# Altium PCB GRIPPER2009.PcbDoc (part 2 of 4)
Units mm, origin at the board's own origin, x right, y up, seen from the top; angles counter-clockwise.
Board outline 100.25 x 80.25 mm, 4 copper layers (Top Layer, Mid-Layer 1, Mid-Layer 2, Bottom Layer); 370 components, 241 nets, 1110 pads, 418 vias.
Unrouted connection lines stored in the file: 10.
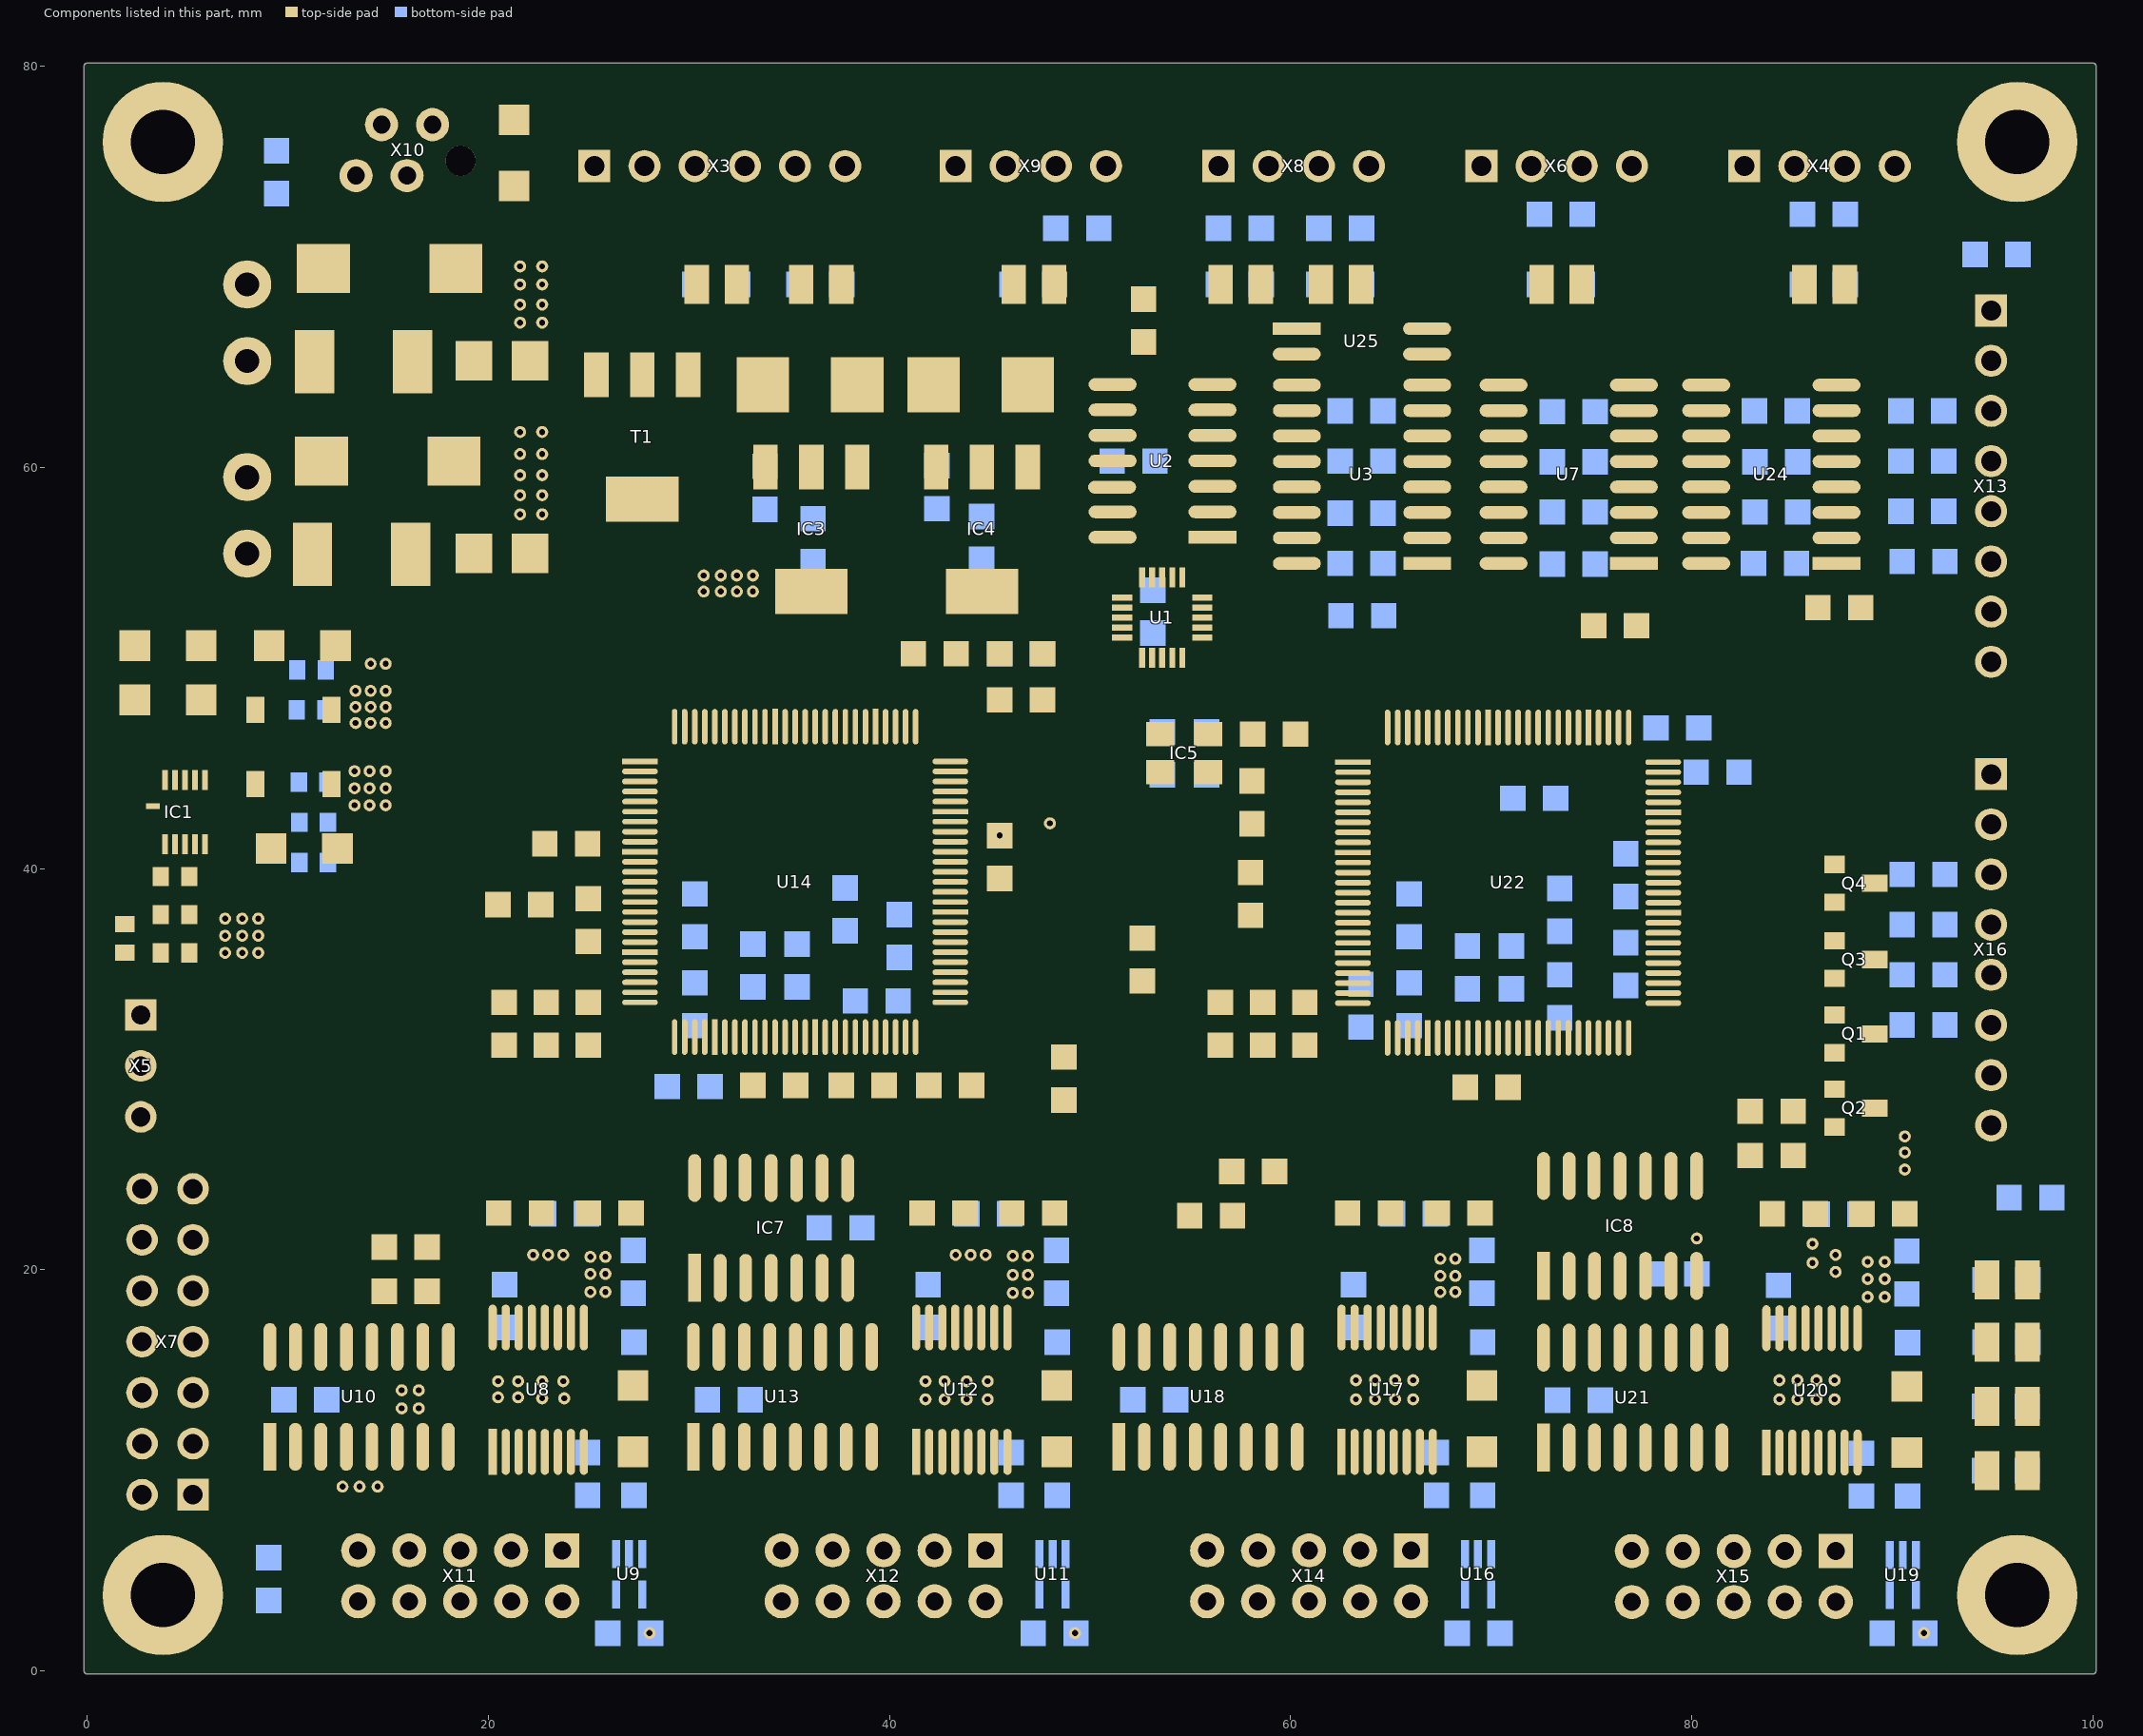
[diagram p4: the components of this part, seen from the top]

## Design rules (kind name [scope] priority, off if disabled: settings) (continued)
ViasUnderSMD VIA_UnderSMD_295 [(Name = 'R24-2')] p679: allowed=FALSE
ViasUnderSMD VIA_UnderSMD_294 [(Name = 'R24-1')] p680: allowed=FALSE
ViasUnderSMD VIA_UnderSMD_293 [(Name = 'R23-2')] p681: allowed=FALSE
ViasUnderSMD VIA_UnderSMD_292 [(Name = 'R23-1')] p682: allowed=FALSE
ViasUnderSMD VIA_UnderSMD_291 [(Name = 'R22-2')] p683: allowed=FALSE
ViasUnderSMD VIA_UnderSMD_290 [(Name = 'R22-1')] p684: allowed=FALSE
ViasUnderSMD VIA_UnderSMD_289 [(Name = 'R21-2')] p685: allowed=FALSE
ViasUnderSMD VIA_UnderSMD_288 [(Name = 'R21-1')] p686: allowed=FALSE
ViasUnderSMD VIA_UnderSMD_287 [(Name = 'R20-2')] p687: allowed=FALSE
ViasUnderSMD VIA_UnderSMD_286 [(Name = 'R20-1')] p688: allowed=FALSE
ViasUnderSMD VIA_UnderSMD_285 [(Name = 'R19-2')] p689: allowed=FALSE
ViasUnderSMD VIA_UnderSMD_284 [(Name = 'R19-1')] p690: allowed=FALSE
ViasUnderSMD VIA_UnderSMD_283 [(Name = 'R18-2')] p691: allowed=FALSE
ViasUnderSMD VIA_UnderSMD_282 [(Name = 'R18-1')] p692: allowed=FALSE
ViasUnderSMD VIA_UnderSMD_281 [(Name = 'R17-2')] p693: allowed=FALSE
ViasUnderSMD VIA_UnderSMD_280 [(Name = 'R17-1')] p694: allowed=FALSE
ViasUnderSMD VIA_UnderSMD_279 [(Name = 'R16-2')] p695: allowed=FALSE
ViasUnderSMD VIA_UnderSMD_278 [(Name = 'R16-1')] p696: allowed=FALSE
ViasUnderSMD VIA_UnderSMD_277 [(Name = 'R15-2')] p697: allowed=FALSE
ViasUnderSMD VIA_UnderSMD_276 [(Name = 'R15-1')] p698: allowed=FALSE
ViasUnderSMD VIA_UnderSMD_275 [(Name = 'R14-2')] p699: allowed=FALSE
ViasUnderSMD VIA_UnderSMD_274 [(Name = 'R14-1')] p700: allowed=FALSE
ViasUnderSMD VIA_UnderSMD_273 [(Name = 'R13-2')] p701: allowed=FALSE
ViasUnderSMD VIA_UnderSMD_272 [(Name = 'R13-1')] p702: allowed=FALSE
ViasUnderSMD VIA_UnderSMD_271 [(Name = 'R12-2')] p703: allowed=FALSE
ViasUnderSMD VIA_UnderSMD_270 [(Name = 'R12-1')] p704: allowed=FALSE
ViasUnderSMD VIA_UnderSMD_269 [(Name = 'R11-2')] p705: allowed=FALSE
ViasUnderSMD VIA_UnderSMD_268 [(Name = 'R11-1')] p706: allowed=FALSE
ViasUnderSMD VIA_UnderSMD_267 [(Name = 'R10-2')] p707: allowed=FALSE
ViasUnderSMD VIA_UnderSMD_266 [(Name = 'R10-1')] p708: allowed=FALSE
ViasUnderSMD VIA_UnderSMD_265 [(Name = 'R8-2')] p709: allowed=FALSE
ViasUnderSMD VIA_UnderSMD_264 [(Name = 'R8-1')] p710: allowed=FALSE
ViasUnderSMD VIA_UnderSMD_263 [(Name = 'R7-2')] p711: allowed=FALSE
ViasUnderSMD VIA_UnderSMD_262 [(Name = 'R7-1')] p712: allowed=FALSE
ViasUnderSMD VIA_UnderSMD_261 [(Name = 'R6-2')] p713: allowed=FALSE
ViasUnderSMD VIA_UnderSMD_260 [(Name = 'R6-1')] p714: allowed=FALSE
ViasUnderSMD VIA_UnderSMD_259 [(Name = 'R5-2')] p715: allowed=FALSE
ViasUnderSMD VIA_UnderSMD_258 [(Name = 'R5-1')] p716: allowed=FALSE
ViasUnderSMD VIA_UnderSMD_257 [(Name = 'R3-2')] p717: allowed=FALSE
ViasUnderSMD VIA_UnderSMD_256 [(Name = 'R3-1')] p718: allowed=FALSE
ViasUnderSMD VIA_UnderSMD_255 [(Name = 'R2-2')] p719: allowed=FALSE
ViasUnderSMD VIA_UnderSMD_254 [(Name = 'R2-1')] p720: allowed=FALSE
ViasUnderSMD VIA_UnderSMD_253 [(Name = 'R1-2')] p721: allowed=FALSE
ViasUnderSMD VIA_UnderSMD_252 [(Name = 'R1-1')] p722: allowed=FALSE
ViasUnderSMD VIA_UnderSMD_251 [(Name = 'Q4-3')] p723: allowed=FALSE
ViasUnderSMD VIA_UnderSMD_250 [(Name = 'Q4-2')] p724: allowed=FALSE
ViasUnderSMD VIA_UnderSMD_249 [(Name = 'Q4-1')] p725: allowed=FALSE
ViasUnderSMD VIA_UnderSMD_248 [(Name = 'Q3-3')] p726: allowed=FALSE
ViasUnderSMD VIA_UnderSMD_247 [(Name = 'Q3-2')] p727: allowed=FALSE
ViasUnderSMD VIA_UnderSMD_246 [(Name = 'Q3-1')] p728: allowed=FALSE
ViasUnderSMD VIA_UnderSMD_245 [(Name = 'Q2-3')] p729: allowed=FALSE
ViasUnderSMD VIA_UnderSMD_244 [(Name = 'Q2-2')] p730: allowed=FALSE
ViasUnderSMD VIA_UnderSMD_243 [(Name = 'Q2-1')] p731: allowed=FALSE
ViasUnderSMD VIA_UnderSMD_242 [(Name = 'Q1-3')] p732: allowed=FALSE
ViasUnderSMD VIA_UnderSMD_241 [(Name = 'Q1-2')] p733: allowed=FALSE
ViasUnderSMD VIA_UnderSMD_240 [(Name = 'Q1-1')] p734: allowed=FALSE
ViasUnderSMD VIA_UnderSMD_239 [(Name = 'L5-2')] p735: allowed=FALSE
ViasUnderSMD VIA_UnderSMD_238 [(Name = 'L5-1')] p736: allowed=FALSE
ViasUnderSMD VIA_UnderSMD_237 [(Name = 'L3-2')] p737: allowed=FALSE
ViasUnderSMD VIA_UnderSMD_236 [(Name = 'L3-1')] p738: allowed=FALSE
ViasUnderSMD VIA_UnderSMD_235 [(Name = 'L2-2')] p739: allowed=FALSE
ViasUnderSMD VIA_UnderSMD_234 [(Name = 'L2-1')] p740: allowed=FALSE
ViasUnderSMD VIA_UnderSMD_233 [(Name = 'L1-2')] p741: allowed=FALSE
ViasUnderSMD VIA_UnderSMD_232 [(Name = 'L1-1')] p742: allowed=FALSE
ViasUnderSMD VIA_UnderSMD_231 [(Name = 'IC8-14')] p743: allowed=FALSE
ViasUnderSMD VIA_UnderSMD_230 [(Name = 'IC8-13')] p744: allowed=FALSE
ViasUnderSMD VIA_UnderSMD_229 [(Name = 'IC8-12')] p745: allowed=FALSE
ViasUnderSMD VIA_UnderSMD_228 [(Name = 'IC8-11')] p746: allowed=FALSE
ViasUnderSMD VIA_UnderSMD_227 [(Name = 'IC8-10')] p747: allowed=FALSE
ViasUnderSMD VIA_UnderSMD_226 [(Name = 'IC8-9')] p748: allowed=FALSE
ViasUnderSMD VIA_UnderSMD_225 [(Name = 'IC8-8')] p749: allowed=FALSE
ViasUnderSMD VIA_UnderSMD_224 [(Name = 'IC8-7')] p750: allowed=FALSE
ViasUnderSMD VIA_UnderSMD_223 [(Name = 'IC8-6')] p751: allowed=FALSE
ViasUnderSMD VIA_UnderSMD_222 [(Name = 'IC8-5')] p752: allowed=FALSE
ViasUnderSMD VIA_UnderSMD_221 [(Name = 'IC8-4')] p753: allowed=FALSE
ViasUnderSMD VIA_UnderSMD_220 [(Name = 'IC8-3')] p754: allowed=FALSE
ViasUnderSMD VIA_UnderSMD_219 [(Name = 'IC8-2')] p755: allowed=FALSE
ViasUnderSMD VIA_UnderSMD_218 [(Name = 'IC8-1')] p756: allowed=FALSE
ViasUnderSMD VIA_UnderSMD_217 [(Name = 'IC7-14')] p757: allowed=FALSE
ViasUnderSMD VIA_UnderSMD_216 [(Name = 'IC7-13')] p758: allowed=FALSE
ViasUnderSMD VIA_UnderSMD_215 [(Name = 'IC7-12')] p759: allowed=FALSE
ViasUnderSMD VIA_UnderSMD_214 [(Name = 'IC7-11')] p760: allowed=FALSE
ViasUnderSMD VIA_UnderSMD_213 [(Name = 'IC7-10')] p761: allowed=FALSE
ViasUnderSMD VIA_UnderSMD_212 [(Name = 'IC7-9')] p762: allowed=FALSE
ViasUnderSMD VIA_UnderSMD_211 [(Name = 'IC7-8')] p763: allowed=FALSE
ViasUnderSMD VIA_UnderSMD_210 [(Name = 'IC7-7')] p764: allowed=FALSE
ViasUnderSMD VIA_UnderSMD_209 [(Name = 'IC7-6')] p765: allowed=FALSE
ViasUnderSMD VIA_UnderSMD_208 [(Name = 'IC7-5')] p766: allowed=FALSE
ViasUnderSMD VIA_UnderSMD_207 [(Name = 'IC7-4')] p767: allowed=FALSE
ViasUnderSMD VIA_UnderSMD_206 [(Name = 'IC7-3')] p768: allowed=FALSE
ViasUnderSMD VIA_UnderSMD_205 [(Name = 'IC7-2')] p769: allowed=FALSE
ViasUnderSMD VIA_UnderSMD_204 [(Name = 'IC7-1')] p770: allowed=FALSE
ViasUnderSMD VIA_UnderSMD_203 [(Name = 'IC5-4')] p771: allowed=FALSE
ViasUnderSMD VIA_UnderSMD_202 [(Name = 'IC5-3')] p772: allowed=FALSE
ViasUnderSMD VIA_UnderSMD_201 [(Name = 'IC5-2')] p773: allowed=FALSE
ViasUnderSMD VIA_UnderSMD_200 [(Name = 'IC5-1')] p774: allowed=FALSE
ViasUnderSMD VIA_UnderSMD_199 [(Name = 'IC4-4')] p775: allowed=FALSE
ViasUnderSMD VIA_UnderSMD_198 [(Name = 'IC4-3')] p776: allowed=FALSE
ViasUnderSMD VIA_UnderSMD_197 [(Name = 'IC4-2')] p777: allowed=FALSE
ViasUnderSMD VIA_UnderSMD_196 [(Name = 'IC4-1')] p778: allowed=FALSE
ViasUnderSMD VIA_UnderSMD_195 [(Name = 'IC3-4')] p779: allowed=FALSE
ViasUnderSMD VIA_UnderSMD_194 [(Name = 'IC3-3')] p780: allowed=FALSE
ViasUnderSMD VIA_UnderSMD_193 [(Name = 'IC3-2')] p781: allowed=FALSE
ViasUnderSMD VIA_UnderSMD_192 [(Name = 'IC3-1')] p782: allowed=FALSE
ViasUnderSMD VIA_UnderSMD_191 [(Name = 'IC1-S')] p783: allowed=FALSE
ViasUnderSMD VIA_UnderSMD_190 [(Name = 'IC1-10')] p784: allowed=FALSE
ViasUnderSMD VIA_UnderSMD_189 [(Name = 'IC1-9')] p785: allowed=FALSE
ViasUnderSMD VIA_UnderSMD_188 [(Name = 'IC1-8')] p786: allowed=FALSE
ViasUnderSMD VIA_UnderSMD_187 [(Name = 'IC1-7')] p787: allowed=FALSE
ViasUnderSMD VIA_UnderSMD_186 [(Name = 'IC1-6')] p788: allowed=FALSE
ViasUnderSMD VIA_UnderSMD_185 [(Name = 'IC1-5')] p789: allowed=FALSE
ViasUnderSMD VIA_UnderSMD_184 [(Name = 'IC1-4')] p790: allowed=FALSE
ViasUnderSMD VIA_UnderSMD_183 [(Name = 'IC1-3')] p791: allowed=FALSE
ViasUnderSMD VIA_UnderSMD_182 [(Name = 'IC1-2')] p792: allowed=FALSE
ViasUnderSMD VIA_UnderSMD_181 [(Name = 'IC1-1')] p793: allowed=FALSE
ViasUnderSMD VIA_UnderSMD_180 [(Name = 'H4-1')] p794: allowed=FALSE
ViasUnderSMD VIA_UnderSMD_179 [(Name = 'H3-1')] p795: allowed=FALSE
ViasUnderSMD VIA_UnderSMD_178 [(Name = 'H2-1')] p796: allowed=FALSE
ViasUnderSMD VIA_UnderSMD_177 [(Name = 'H1-1')] p797: allowed=FALSE
ViasUnderSMD VIA_UnderSMD_176 [(Name = 'F2-2')] p798: allowed=FALSE
ViasUnderSMD VIA_UnderSMD_175 [(Name = 'F2-1')] p799: allowed=FALSE
ViasUnderSMD VIA_UnderSMD_174 [(Name = 'F1-2')] p800: allowed=FALSE
ViasUnderSMD VIA_UnderSMD_173 [(Name = 'F1-1')] p801: allowed=FALSE
ViasUnderSMD VIA_UnderSMD_172 [(Name = 'D13-2')] p802: allowed=FALSE
ViasUnderSMD VIA_UnderSMD_171 [(Name = 'D13-1')] p803: allowed=FALSE
ViasUnderSMD VIA_UnderSMD_170 [(Name = 'D12-2')] p804: allowed=FALSE
ViasUnderSMD VIA_UnderSMD_169 [(Name = 'D12-1')] p805: allowed=FALSE
ViasUnderSMD VIA_UnderSMD_168 [(Name = 'D11-2')] p806: allowed=FALSE
ViasUnderSMD VIA_UnderSMD_167 [(Name = 'D11-1')] p807: allowed=FALSE
ViasUnderSMD VIA_UnderSMD_166 [(Name = 'D10-2')] p808: allowed=FALSE
ViasUnderSMD VIA_UnderSMD_165 [(Name = 'D10-1')] p809: allowed=FALSE
ViasUnderSMD VIA_UnderSMD_164 [(Name = 'D9-2')] p810: allowed=FALSE
ViasUnderSMD VIA_UnderSMD_163 [(Name = 'D9-1')] p811: allowed=FALSE
ViasUnderSMD VIA_UnderSMD_162 [(Name = 'D8-2')] p812: allowed=FALSE
ViasUnderSMD VIA_UnderSMD_161 [(Name = 'D8-1')] p813: allowed=FALSE
ViasUnderSMD VIA_UnderSMD_160 [(Name = 'D7-2')] p814: allowed=FALSE
ViasUnderSMD VIA_UnderSMD_159 [(Name = 'D7-1')] p815: allowed=FALSE
ViasUnderSMD VIA_UnderSMD_158 [(Name = 'D6-2')] p816: allowed=FALSE
ViasUnderSMD VIA_UnderSMD_157 [(Name = 'D6-1')] p817: allowed=FALSE
ViasUnderSMD VIA_UnderSMD_156 [(Name = 'D5-2')] p818: allowed=FALSE
ViasUnderSMD VIA_UnderSMD_155 [(Name = 'D5-1')] p819: allowed=FALSE
ViasUnderSMD VIA_UnderSMD_154 [(Name = 'D4-1')] p820: allowed=FALSE
ViasUnderSMD VIA_UnderSMD_153 [(Name = 'D4-2')] p821: allowed=FALSE
ViasUnderSMD VIA_UnderSMD_152 [(Name = 'D3-2')] p822: allowed=FALSE
ViasUnderSMD VIA_UnderSMD_151 [(Name = 'D3-1')] p823: allowed=FALSE
ViasUnderSMD VIA_UnderSMD_150 [(Name = 'D2-1')] p824: allowed=FALSE
ViasUnderSMD VIA_UnderSMD_149 [(Name = 'D2-2')] p825: allowed=FALSE
ViasUnderSMD VIA_UnderSMD_148 [(Name = 'D1-2')] p826: allowed=FALSE
ViasUnderSMD VIA_UnderSMD_147 [(Name = 'D1-1')] p827: allowed=FALSE
ViasUnderSMD VIA_UnderSMD_146 [(Name = 'C79-2')] p828: allowed=FALSE
ViasUnderSMD VIA_UnderSMD_145 [(Name = 'C79-1')] p829: allowed=FALSE
ViasUnderSMD VIA_UnderSMD_144 [(Name = 'C78-2')] p830: allowed=FALSE
ViasUnderSMD VIA_UnderSMD_143 [(Name = 'C78-1')] p831: allowed=FALSE
ViasUnderSMD VIA_UnderSMD_142 [(Name = 'C77-2')] p832: allowed=FALSE
ViasUnderSMD VIA_UnderSMD_141 [(Name = 'C77-1')] p833: allowed=FALSE
ViasUnderSMD VIA_UnderSMD_140 [(Name = 'C76-2')] p834: allowed=FALSE
ViasUnderSMD VIA_UnderSMD_139 [(Name = 'C76-1')] p835: allowed=FALSE
ViasUnderSMD VIA_UnderSMD_138 [(Name = 'C75-2')] p836: allowed=FALSE
ViasUnderSMD VIA_UnderSMD_137 [(Name = 'C75-1')] p837: allowed=FALSE
ViasUnderSMD VIA_UnderSMD_136 [(Name = 'C74-2')] p838: allowed=FALSE
ViasUnderSMD VIA_UnderSMD_135 [(Name = 'C74-1')] p839: allowed=FALSE
ViasUnderSMD VIA_UnderSMD_134 [(Name = 'C73-2')] p840: allowed=FALSE
ViasUnderSMD VIA_UnderSMD_133 [(Name = 'C73-1')] p841: allowed=FALSE
ViasUnderSMD VIA_UnderSMD_132 [(Name = 'C72-2')] p842: allowed=FALSE
ViasUnderSMD VIA_UnderSMD_131 [(Name = 'C72-1')] p843: allowed=FALSE
ViasUnderSMD VIA_UnderSMD_130 [(Name = 'C71-2')] p844: allowed=FALSE
ViasUnderSMD VIA_UnderSMD_129 [(Name = 'C71-1')] p845: allowed=FALSE
ViasUnderSMD VIA_UnderSMD_128 [(Name = 'C70-2')] p846: allowed=FALSE
ViasUnderSMD VIA_UnderSMD_127 [(Name = 'C70-1')] p847: allowed=FALSE
ViasUnderSMD VIA_UnderSMD_126 [(Name = 'C69-2')] p848: allowed=FALSE
ViasUnderSMD VIA_UnderSMD_125 [(Name = 'C69-1')] p849: allowed=FALSE
ViasUnderSMD VIA_UnderSMD_124 [(Name = 'C68-2')] p850: allowed=FALSE
ViasUnderSMD VIA_UnderSMD_123 [(Name = 'C68-1')] p851: allowed=FALSE
ViasUnderSMD VIA_UnderSMD_122 [(Name = 'C67-2')] p852: allowed=FALSE
ViasUnderSMD VIA_UnderSMD_121 [(Name = 'C67-1')] p853: allowed=FALSE
ViasUnderSMD VIA_UnderSMD_120 [(Name = 'C66-2')] p854: allowed=FALSE
ViasUnderSMD VIA_UnderSMD_119 [(Name = 'C66-1')] p855: allowed=FALSE
ViasUnderSMD VIA_UnderSMD_118 [(Name = 'C65-2')] p856: allowed=FALSE
ViasUnderSMD VIA_UnderSMD_117 [(Name = 'C65-1')] p857: allowed=FALSE
ViasUnderSMD VIA_UnderSMD_116 [(Name = 'C64-2')] p858: allowed=FALSE
ViasUnderSMD VIA_UnderSMD_115 [(Name = 'C64-1')] p859: allowed=FALSE
ViasUnderSMD VIA_UnderSMD_114 [(Name = 'C63-2')] p860: allowed=FALSE
ViasUnderSMD VIA_UnderSMD_113 [(Name = 'C63-1')] p861: allowed=FALSE
ViasUnderSMD VIA_UnderSMD_112 [(Name = 'C62-2')] p862: allowed=FALSE
ViasUnderSMD VIA_UnderSMD_111 [(Name = 'C62-1')] p863: allowed=FALSE
ViasUnderSMD VIA_UnderSMD_110 [(Name = 'C61-2')] p864: allowed=FALSE
ViasUnderSMD VIA_UnderSMD_109 [(Name = 'C61-1')] p865: allowed=FALSE
ViasUnderSMD VIA_UnderSMD_108 [(Name = 'C60-2')] p866: allowed=FALSE
ViasUnderSMD VIA_UnderSMD_107 [(Name = 'C60-1')] p867: allowed=FALSE
ViasUnderSMD VIA_UnderSMD_106 [(Name = 'C59-2')] p868: allowed=FALSE
ViasUnderSMD VIA_UnderSMD_105 [(Name = 'C59-1')] p869: allowed=FALSE
ViasUnderSMD VIA_UnderSMD_104 [(Name = 'C58-2')] p870: allowed=FALSE
ViasUnderSMD VIA_UnderSMD_103 [(Name = 'C58-1')] p871: allowed=FALSE
ViasUnderSMD VIA_UnderSMD_102 [(Name = 'C57-2')] p872: allowed=FALSE
ViasUnderSMD VIA_UnderSMD_101 [(Name = 'C57-1')] p873: allowed=FALSE
ViasUnderSMD VIA_UnderSMD_100 [(Name = 'C56-2')] p874: allowed=FALSE
ViasUnderSMD VIA_UnderSMD_99 [(Name = 'C56-1')] p875: allowed=FALSE
ViasUnderSMD VIA_UnderSMD_98 [(Name = 'C55-2')] p876: allowed=FALSE
ViasUnderSMD VIA_UnderSMD_97 [(Name = 'C55-1')] p877: allowed=FALSE
ViasUnderSMD VIA_UnderSMD_96 [(Name = 'C54-2')] p878: allowed=FALSE
ViasUnderSMD VIA_UnderSMD_95 [(Name = 'C54-1')] p879: allowed=FALSE
ViasUnderSMD VIA_UnderSMD_94 [(Name = 'C53-2')] p880: allowed=FALSE
ViasUnderSMD VIA_UnderSMD_93 [(Name = 'C53-1')] p881: allowed=FALSE
ViasUnderSMD VIA_UnderSMD_92 [(Name = 'C52-2')] p882: allowed=FALSE
ViasUnderSMD VIA_UnderSMD_91 [(Name = 'C52-1')] p883: allowed=FALSE
ViasUnderSMD VIA_UnderSMD_90 [(Name = 'C51-2')] p884: allowed=FALSE
ViasUnderSMD VIA_UnderSMD_89 [(Name = 'C51-1')] p885: allowed=FALSE
ViasUnderSMD VIA_UnderSMD_88 [(Name = 'C49-2')] p886: allowed=FALSE
ViasUnderSMD VIA_UnderSMD_87 [(Name = 'C49-1')] p887: allowed=FALSE
ViasUnderSMD VIA_UnderSMD_86 [(Name = 'C48-2')] p888: allowed=FALSE
ViasUnderSMD VIA_UnderSMD_85 [(Name = 'C48-1')] p889: allowed=FALSE
ViasUnderSMD VIA_UnderSMD_84 [(Name = 'C47-2')] p890: allowed=FALSE
ViasUnderSMD VIA_UnderSMD_83 [(Name = 'C47-1')] p891: allowed=FALSE
ViasUnderSMD VIA_UnderSMD_82 [(Name = 'C46-2')] p892: allowed=FALSE
ViasUnderSMD VIA_UnderSMD_81 [(Name = 'C46-1')] p893: allowed=FALSE
ViasUnderSMD VIA_UnderSMD_80 [(Name = 'C45-2')] p894: allowed=FALSE
ViasUnderSMD VIA_UnderSMD_79 [(Name = 'C45-1')] p895: allowed=FALSE
ViasUnderSMD VIA_UnderSMD_78 [(Name = 'C43-2')] p896: allowed=FALSE
ViasUnderSMD VIA_UnderSMD_77 [(Name = 'C43-1')] p897: allowed=FALSE
ViasUnderSMD VIA_UnderSMD_76 [(Name = 'C42-2')] p898: allowed=FALSE
ViasUnderSMD VIA_UnderSMD_75 [(Name = 'C42-1')] p899: allowed=FALSE
ViasUnderSMD VIA_UnderSMD_74 [(Name = 'C41-2')] p900: allowed=FALSE
ViasUnderSMD VIA_UnderSMD_73 [(Name = 'C41-1')] p901: allowed=FALSE
ViasUnderSMD VIA_UnderSMD_72 [(Name = 'C40-2')] p902: allowed=FALSE
ViasUnderSMD VIA_UnderSMD_71 [(Name = 'C40-1')] p903: allowed=FALSE
ViasUnderSMD VIA_UnderSMD_70 [(Name = 'C39-2')] p904: allowed=FALSE
ViasUnderSMD VIA_UnderSMD_69 [(Name = 'C39-1')] p905: allowed=FALSE
ViasUnderSMD VIA_UnderSMD_68 [(Name = 'C38-2')] p906: allowed=FALSE
ViasUnderSMD VIA_UnderSMD_67 [(Name = 'C38-1')] p907: allowed=FALSE
ViasUnderSMD VIA_UnderSMD_66 [(Name = 'C37-2')] p908: allowed=FALSE
ViasUnderSMD VIA_UnderSMD_65 [(Name = 'C37-1')] p909: allowed=FALSE
ViasUnderSMD VIA_UnderSMD_64 [(Name = 'C36-2')] p910: allowed=FALSE
ViasUnderSMD VIA_UnderSMD_63 [(Name = 'C36-1')] p911: allowed=FALSE
ViasUnderSMD VIA_UnderSMD_62 [(Name = 'C35-2')] p912: allowed=FALSE
ViasUnderSMD VIA_UnderSMD_61 [(Name = 'C35-1')] p913: allowed=FALSE
ViasUnderSMD VIA_UnderSMD_60 [(Name = 'C34-2')] p914: allowed=FALSE
ViasUnderSMD VIA_UnderSMD_59 [(Name = 'C34-1')] p915: allowed=FALSE
ViasUnderSMD VIA_UnderSMD_58 [(Name = 'C33-2')] p916: allowed=FALSE
ViasUnderSMD VIA_UnderSMD_57 [(Name = 'C33-1')] p917: allowed=FALSE
ViasUnderSMD VIA_UnderSMD_56 [(Name = 'C32-2')] p918: allowed=FALSE
ViasUnderSMD VIA_UnderSMD_55 [(Name = 'C32-1')] p919: allowed=FALSE
ViasUnderSMD VIA_UnderSMD_54 [(Name = 'C31-2')] p920: allowed=FALSE
ViasUnderSMD VIA_UnderSMD_53 [(Name = 'C31-1')] p921: allowed=FALSE
ViasUnderSMD VIA_UnderSMD_52 [(Name = 'C30-2')] p922: allowed=FALSE
ViasUnderSMD VIA_UnderSMD_51 [(Name = 'C30-1')] p923: allowed=FALSE
ViasUnderSMD VIA_UnderSMD_50 [(Name = 'C29-2')] p924: allowed=FALSE
ViasUnderSMD VIA_UnderSMD_49 [(Name = 'C29-1')] p925: allowed=FALSE
ViasUnderSMD VIA_UnderSMD_48 [(Name = 'C28-2')] p926: allowed=FALSE
ViasUnderSMD VIA_UnderSMD_47 [(Name = 'C28-1')] p927: allowed=FALSE
ViasUnderSMD VIA_UnderSMD_46 [(Name = 'C27-2')] p928: allowed=FALSE
ViasUnderSMD VIA_UnderSMD_45 [(Name = 'C27-1')] p929: allowed=FALSE
ViasUnderSMD VIA_UnderSMD_44 [(Name = 'C26-2')] p930: allowed=FALSE
ViasUnderSMD VIA_UnderSMD_43 [(Name = 'C26-1')] p931: allowed=FALSE
ViasUnderSMD VIA_UnderSMD_42 [(Name = 'C25-2')] p932: allowed=FALSE
ViasUnderSMD VIA_UnderSMD_41 [(Name = 'C25-1')] p933: allowed=FALSE
ViasUnderSMD VIA_UnderSMD_40 [(Name = 'C23-2')] p934: allowed=FALSE
ViasUnderSMD VIA_UnderSMD_39 [(Name = 'C23-1')] p935: allowed=FALSE
ViasUnderSMD VIA_UnderSMD_38 [(Name = 'C22-2')] p936: allowed=FALSE
ViasUnderSMD VIA_UnderSMD_37 [(Name = 'C22-1')] p937: allowed=FALSE
ViasUnderSMD VIA_UnderSMD_36 [(Name = 'C21-2')] p938: allowed=FALSE
ViasUnderSMD VIA_UnderSMD_35 [(Name = 'C21-1')] p939: allowed=FALSE
ViasUnderSMD VIA_UnderSMD_34 [(Name = 'C20-2')] p940: allowed=FALSE
ViasUnderSMD VIA_UnderSMD_33 [(Name = 'C20-1')] p941: allowed=FALSE
ViasUnderSMD VIA_UnderSMD_32 [(Name = 'C18-2')] p942: allowed=FALSE
ViasUnderSMD VIA_UnderSMD_31 [(Name = 'C18-1')] p943: allowed=FALSE
ViasUnderSMD VIA_UnderSMD_30 [(Name = 'C17-2')] p944: allowed=FALSE
ViasUnderSMD VIA_UnderSMD_29 [(Name = 'C17-1')] p945: allowed=FALSE
ViasUnderSMD VIA_UnderSMD_28 [(Name = 'C16-2')] p946: allowed=FALSE
ViasUnderSMD VIA_UnderSMD_27 [(Name = 'C16-1')] p947: allowed=FALSE
ViasUnderSMD VIA_UnderSMD_26 [(Name = 'C15-2')] p948: allowed=FALSE
ViasUnderSMD VIA_UnderSMD_25 [(Name = 'C15-1')] p949: allowed=FALSE
ViasUnderSMD VIA_UnderSMD_24 [(Name = 'C14-2')] p950: allowed=FALSE
ViasUnderSMD VIA_UnderSMD_23 [(Name = 'C14-1')] p951: allowed=FALSE
ViasUnderSMD VIA_UnderSMD_22 [(Name = 'C13-2')] p952: allowed=FALSE
ViasUnderSMD VIA_UnderSMD_21 [(Name = 'C13-1')] p953: allowed=FALSE
ViasUnderSMD VIA_UnderSMD_20 [(Name = 'C12-2')] p954: allowed=FALSE
ViasUnderSMD VIA_UnderSMD_19 [(Name = 'C12-1')] p955: allowed=FALSE
ViasUnderSMD VIA_UnderSMD_18 [(Name = 'C11-2')] p956: allowed=FALSE
ViasUnderSMD VIA_UnderSMD_17 [(Name = 'C11-1')] p957: allowed=FALSE
ViasUnderSMD VIA_UnderSMD_16 [(Name = 'C10-2')] p958: allowed=FALSE
ViasUnderSMD VIA_UnderSMD_15 [(Name = 'C10-1')] p959: allowed=FALSE
ViasUnderSMD VIA_UnderSMD_14 [(Name = 'C9-2')] p960: allowed=FALSE
ViasUnderSMD VIA_UnderSMD_13 [(Name = 'C9-1')] p961: allowed=FALSE
ViasUnderSMD VIA_UnderSMD_12 [(Name = 'C8-2')] p962: allowed=FALSE
ViasUnderSMD VIA_UnderSMD_11 [(Name = 'C8-1')] p963: allowed=FALSE
ViasUnderSMD VIA_UnderSMD_10 [(Name = 'C7-2')] p964: allowed=FALSE
ViasUnderSMD VIA_UnderSMD_9 [(Name = 'C7-1')] p965: allowed=FALSE
ViasUnderSMD VIA_UnderSMD_8 [(Name = 'C6-2')] p966: allowed=FALSE
ViasUnderSMD VIA_UnderSMD_7 [(Name = 'C6-1')] p967: allowed=FALSE
ViasUnderSMD VIA_UnderSMD_6 [(Name = 'C5-2')] p968: allowed=FALSE
ViasUnderSMD VIA_UnderSMD_5 [(Name = 'C5-1')] p969: allowed=FALSE
ViasUnderSMD VIA_UnderSMD_4 [(Name = 'C3-2')] p970: allowed=FALSE
ViasUnderSMD VIA_UnderSMD_3 [(Name = 'C3-1')] p971: allowed=FALSE
ViasUnderSMD VIA_UnderSMD_2 [(Name = 'C1-2')] p972: allowed=FALSE
ViasUnderSMD VIA_UnderSMD_1 [(Name = 'C1-1')] p973: allowed=FALSE
Width Net_Width_24 [InNet('EPWMSYNCI') Or InNet('EPWMSYNCO') Or InNet('PWM OUT') Or InNet('PWM OUT_3967') Or InNet('AIN') Or InNet('AIN_3977')] p1: maxlimit=0.005 minlimit=0.005 preferedwidth=0.005
Width Net_Width_23 [InNet('N159775131') Or InNet('N159775491') Or InNet('N159775891') Or InNet('N162067501') Or InNet('PGND') Or InNet('PWR') Or InNet('SCL') Or InNet('SDA')] p2: maxlimit=0.5 minlimit=0.15 preferedwidth=0.15
Width Net_Width_22 [InNet('N157561341') Or InNet('N158566590') Or InNet('N158566590_2577') Or InNet('N158566591') Or InNet('N158566591_2572') Or InNet('N158572210') Or InNet('N158572210_2574') Or InNet('N158572211') Or InNet('N158572211_2570') Or InNet('N159765961')] p3: maxlimit=0.5 minlimit=0.15 preferedwidth=0.15
Width Net_Width_21 [InNet('N16133214_4676') Or InNet('N16136613') Or InNet('N16136613_4682') Or InNet('N16137258') Or InNet('N16137258_4684') Or InNet('N16163728') Or InNet('N16163728_4947') Or InNet('N16195700') Or InNet('N16216551') Or InNet('N16273515')] p4: maxlimit=0.5 minlimit=0.15 preferedwidth=0.15
Width Net_Width_20 [InNet('N16115526_4468') Or InNet('N16115875') Or InNet('N16115875_4470') Or InNet('N16116226') Or InNet('N16116226_4472') Or InNet('N16123985') Or InNet('N16123985_4670') Or InNet('N16132305') Or InNet('N16132305_4674') Or InNet('N16133214')] p5: maxlimit=0.5 minlimit=0.15 preferedwidth=0.15
Width Net_Width_19 [InNet('N16108293_4895') Or InNet('N16108485') Or InNet('N16108485_4897') Or InNet('N16108485_4898') Or InNet('N16108485_4899') Or InNet('N16108683') Or InNet('N16108683_4901') Or InNet('N16108683_4902') Or InNet('N16108683_4903') Or InNet('N16115526')] p6: maxlimit=0.5 minlimit=0.15 preferedwidth=0.15
Width Net_Width_18 [InNet('N16107638_4886') Or InNet('N16107638_4887') Or InNet('N16107815') Or InNet('N16107815_4889') Or InNet('N16107815_4890') Or InNet('N16107815_4891') Or InNet('N16108293') Or InNet('N16108293_4893') Or InNet('N16108293_4894') Or InNet('N16273690')] p7: maxlimit=0.5 minlimit=0.15 preferedwidth=0.15
Width Net_Width_17 [InNet('N16100491_4388') Or InNet('N16100491_4498') Or InNet('N16100491_4621') Or InNet('N16101266') Or InNet('N16107374') Or InNet('N16107374_4881') Or InNet('N16107374_4882') Or InNet('N16107374_4883') Or InNet('N16107638') Or InNet('N16107638_4885')] p8: maxlimit=0.5 minlimit=0.15 preferedwidth=0.15
Width Net_Width_16 [InNet('N16100427_4624') Or InNet('N16100435') Or InNet('N16100435_4397') Or InNet('N16100435_4507') Or InNet('N16100435_4630') Or InNet('N16100487') Or InNet('N16100487_4399') Or InNet('N16100487_4508') Or InNet('N16100487_4631') Or InNet('N16100491')] p9: maxlimit=0.5 minlimit=0.15 preferedwidth=0.15
Width Net_Width_15 [InNet('N16100371_4509') Or InNet('N16100371_4632') Or InNet('N16100395') Or InNet('N16100395_4390') Or InNet('N16100395_4500') Or InNet('N16100395_4623') Or InNet('N16100427') Or InNet('N16100427_4391') Or InNet('N16100427_4501') Or InNet('N16273867')] p10: maxlimit=0.5 minlimit=0.15 preferedwidth=0.15
Width Net_Width_14 [InNet('N16100227_4403') Or InNet('N16100227_4512') Or InNet('N16100227_4635') Or InNet('N16100323') Or InNet('N16100323_4401') Or InNet('N16100323_4510') Or InNet('N16100323_4633') Or InNet('N16100371') Or InNet('N16100371_4400') Or InNet('N16274046')] p11: maxlimit=0.5 minlimit=0.15 preferedwidth=0.15
Width Net_Width_13 [InNet('N16065088') Or InNet('N16067588') Or InNet('N16082815') Or InNet('N16083562') Or InNet('N16083671') Or InNet('N16099925') Or InNet('N16099925_4383') Or InNet('N16099925_4495') Or InNet('N16099925_4618') Or InNet('N16100227') Or InNet('N157548521')] p12: maxlimit=0.5 minlimit=0.15 preferedwidth=0.15
Width Net_Width_12 [InNet('N15983658') Or InNet('N15983893') Or InNet('N15983893_3880') Or InNet('N15984374') Or InNet('N15984374_3882') Or InNet('N15984858') Or InNet('N15984858_3884') Or InNet('N15985345') Or InNet('N15985345_3886') Or InNet('N16007951')] p13: maxlimit=0.5 minlimit=0.15 preferedwidth=0.15
Width Net_Width_11 [InNet('N15975490_3846') Or InNet('N15975944') Or InNet('N15975944_3848') Or InNet('N15976400') Or InNet('N15976400_3850') Or InNet('N15976858') Or InNet('N15976858_3852') Or InNet('N15982543') Or InNet('N15982913') Or InNet('N15983284')] p14: maxlimit=0.5 minlimit=0.15 preferedwidth=0.15
Width Net_Width_10 [InNet('N15972825') Or InNet('N15973694') Or InNet('N15973694_3838') Or InNet('N15974140') Or InNet('N15974140_3840') Or InNet('N15974588') Or InNet('N15974588_3842') Or InNet('N15975038') Or InNet('N15975038_3844') Or InNet('N15975490')] p15: maxlimit=0.5 minlimit=0.15 preferedwidth=0.15
Width Net_Width_9 [InNet('N15878002') Or InNet('N15878863') Or InNet('N15879489') Or InNet('N15882073') Or InNet('N15882739') Or InNet('N15932011') Or InNet('N15932045') Or InNet('N15932053') Or InNet('N15932099') Or InNet('N15932257') Or InNet('N15932803')] p16: maxlimit=0.5 minlimit=0.15 preferedwidth=0.15
Width Net_Width_8 [InNet('N15795123') Or InNet('N15795127') Or InNet('N15795225') Or InNet('N15795229') Or InNet('N15867067') Or InNet('N15867073') Or InNet('N15869117') Or InNet('N15872763') Or InNet('N15873803') Or InNet('N15874402') Or InNet('N15875912')] p17: maxlimit=0.5 minlimit=0.15 preferedwidth=0.15
Width Net_Width_7 [InNet('N15732451') Or InNet('N15732475') Or InNet('N15733935') Or InNet('N15733959') Or InNet('N15735807') Or InNet('N15735831') Or InNet('N15745335') Or InNet('N15745359') Or InNet('N15756885') Or InNet('N15757211') Or InNet('N15772152')] p18: maxlimit=0.5 minlimit=0.15 preferedwidth=0.15
Width Net_Width_6 [InNet('N15697591') Or InNet('N15708299') Or InNet('N15708884') Or InNet('N15712464') Or InNet('N15713712') Or InNet('N15720446') Or InNet('N15720486') Or InNet('N15728555') Or InNet('N15731166') Or InNet('N15731174') Or InNet('N15731214')] p19: maxlimit=0.5 minlimit=0.15 preferedwidth=0.15
Width Net_Width_5 [InNet('N13840259') Or InNet('N13840259_2491') Or InNet('N13847925') Or InNet('N13847925_4678') Or InNet('N13853734') Or InNet('N13853734_2560') Or InNet('N13855311') Or InNet('N13855311_2498') Or InNet('N15685693') Or InNet('N15697589')] p20: maxlimit=0.5 minlimit=0.15 preferedwidth=0.15
Width Net_Width_4 [InNet('N13828962') Or InNet('N13828962_2543') Or InNet('N13829654') Or InNet('N13829654_2490') Or InNet('N13830354') Or InNet('N13830354_2504') Or InNet('N13832239') Or InNet('N13832239_4662') Or InNet('N13832960') Or InNet('N13832960_4664')] p21: maxlimit=0.5 minlimit=0.15 preferedwidth=0.15
Width Net_Width_3 [InNet('N13824403') Or InNet('N13824403_2999') Or InNet('N13825712') Or InNet('N13825712_4466') Or InNet('N13826599') Or InNet('N13826599_2503') Or InNet('N13827602') Or InNet('N13827602_3002') Or InNet('N13828620') Or InNet('N13828620_4462')] p22: maxlimit=0.5 minlimit=0.15 preferedwidth=0.15
Width Net_Width_2 [InNet('N12412716') Or InNet('N12412716_2537') Or InNet('N12420570') Or InNet('N12420570_2558') Or InNet('N12420594') Or InNet('N12420594_2499') Or InNet('N12420674') Or InNet('N12420674_4459') Or InNet('N13824081') Or InNet('N13824081_4656')] p23: maxlimit=0.5 minlimit=0.15 preferedwidth=0.15
Width Net_Width_1 [InNet('+1.8V') Or InNet('+3.3V') Or InNet('+5V') Or InNet('+12V') Or InNet('AGND') Or InNet('GND') Or InNet('N11293825') Or InNet('N11293825_2530') Or InNet('N11294255') Or InNet('N11294255_3010') Or InNet('N12411234') Or InNet('N12411234_4452')] p24: maxlimit=0.5 minlimit=0.15 preferedwidth=0.15
Width [All] p25: maxlimit=0.508 minlimit=0.152 preferedwidth=0.152
28 further rules are at their usual default settings.

## Components (designator, comment, footprint, x,y, rotation, side; value= is the part's Value field where it differs from the comment)
C1 "10uF" HEIG/SM/CT_7343 18.302,60.298 r180 top
C3 "10uF" HEIG/SM/CT_7343 18.402,69.898 r180 top
C5 "22uF" HEIG/SM/C_1206 12.402,51.1 r180 top
C6 "47uF" HEIG/SM/C_1206 2.4,51.1 r0 top
C7 "47uF" HEIG/SM/C_1206 2.4,48.4 r0 top
C8 "100nF" HEIG/SM/C_0603#1 5.122,35.8 r180 top
C9 "10nF" HEIG/SM/C_0603#1 1.9,37.222 r270 top
C10 "33pF" HEIG/SM/C_0603#2 12.022,40.3 r0 bottom
C11 "22uF" HEIG/SM/C_1206 12.5,41 r180 top
C12 "100nF" HEIG/SM/C_0805#1 53.6,46.8 r90 bottom
C13 "22pF" HEIG/SM/C_0805#1 55.8,46.8 r90 bottom
C14 "100nF" HEIG/SM/C_0805#1 45.5,50.7 r180 bottom
C15 "100nF" HEIG/SM/C_0805#2 25,22.833 r0 top
C16 "100nF" HEIG/SM/C_0805#1 24.9,22.8 r0 bottom
C17 "100nF" HEIG/SM/C_0805#1 20.833,17.133 r270 bottom
C18 "220nF" HEIG/SM/C_0805#2 20.533,22.833 r0 top
C20 "100nF" HEIG/SM/C_0805#1 9.833,13.533 r180 bottom
C21 "100nF" HEIG/SM/C_0805#1 46,22.8 r0 bottom
C22 "100nF" HEIG/SM/C_0805#1 30.933,13.533 r180 bottom
C23 "220nF" HEIG/SM/C_0805#2 41.633,22.833 r0 top
C25 "100nF" HEIG/SM/C_0805#1 41.933,17.133 r270 bottom
C26 "100nF" HEIG/SM/C_0805#2 46.1,22.833 r0 top
C27 "10nF" HEIG/SM/C_0805#1 30.3,34.3 r90 bottom
C28 "10nF" HEIG/SM/C_0805#1 30.3,36.6 r270 bottom
C29 "10uF" HEIG/SM/C_0805#1 35.4,34.1 r270 bottom
C30 "10uF" HEIG/SM/C_0805#1 33.2,34.1 r270 bottom
C31 "100nF" HEIG/SM/C_0805#2 24.967,41.233 r180 top
C32 "100nF" HEIG/SM/C_0805#1 40.5,37.7 r90 bottom
C33 "100nF" HEIG/SM/C_0805#2 45.5,39.5 r90 top
C34 "100nF" HEIG/SM/C_0805#2 37.6,29.2 r0 top
C35 "100nF" HEIG/SM/C_0805#1 38.3,33.4 r180 bottom
C36 "100nF" HEIG/SM/C_0805#1 37.8,36.9 r270 bottom
C37 "10uF" HEIG/SM/C_0805#1 31.067,29.133 r0 bottom
C38 "10uF" HEIG/SM/C_0805#2 52.6,36.534 r270 top
C39 "100nF" HEIG/SM/C_0805#2 25,38.5 r270 top
C40 "100nF" HEIG/SM/C_0805#2 25,31.2 r90 top
C41 "100nF" HEIG/SM/C_0805#1 67.2,22.8 r0 bottom
C42 "100nF" HEIG/SM/C_0805#1 52.133,13.533 r180 bottom
C43 "220nF" HEIG/SM/C_0805#2 62.833,22.833 r0 top
C45 "100nF" HEIG/SM/C_0805#1 63.133,17.133 r270 bottom
C46 "100nF" HEIG/SM/C_0805#2 67.3,22.833 r0 top
C47 "100nF" HEIG/SM/C_0805#1 88.367,22.767 r0 bottom
C48 "100nF" HEIG/SM/C_0805#1 73.3,13.5 r180 bottom
C49 "220nF" HEIG/SM/C_0805#2 84,22.8 r0 top
C51 "100nF" HEIG/SM/C_0805#1 84.3,17.1 r270 bottom
C52 "100nF" HEIG/SM/C_0805#2 88.466,22.8 r0 top
C53 "100nF" HEIG/SM/C_0805#1 80.2,44.8 r180 bottom
C54 "10nF" HEIG/SM/C_0805#1 65.9,34.3 r90 bottom
C55 "100nF" HEIG/SM/C_0805#1 76.7,38.6 r270 bottom
C56 "10nF" HEIG/SM/C_0805#1 65.9,36.6 r270 bottom
C57 "100nF" HEIG/SM/C_0805#1 73.4,39 r90 bottom
C58 "10uF" HEIG/SM/C_0805#1 63.5,32.1 r270 bottom
C59 "100nF" HEIG/SM/C_0805#1 76.7,36.3 r90 bottom
C60 "100nF" HEIG/SM/C_0805#1 80.334,47 r0 bottom
C61 "100nF" HEIG/SM/C_0805#1 73.4,34.7 r90 bottom
C62 "10uF" HEIG/SM/C_0805#1 68.8,34 r270 bottom
C63 "100nF" HEIG/SM/C_0805#2 58,39.8 r270 top
C64 "10uF" HEIG/SM/C_0805#1 73.2,43.5 r0 bottom
C65 "10uF" HEIG/SM/C_0805#1 71,34 r270 bottom
C66 "100nF" HEIG/SM/C_0805#2 60.7,31.2 r90 top
C67 "100nF" HEIG/SM/C_0805#1 53.133,53.867 r90 bottom
C68 "100nF" HEIG/SM/C_0805#1 44.6,55.4 r270 bottom
C69 "100nF" HEIG/SM/C_0805#1 36.2,55.3 r270 bottom
C70 "100nF" HEIG/SM/C_0805#2 52.667,66.233 r90 top
C71 "100nF" HEIG/SM/C_0805#1 64.634,52.6 r0 bottom
C72 "100nF" HEIG/SM/C_0805#1 47.166,1.9 r180 bottom
C73 "100nF" HEIG/SM/C_0805#1 25.966,1.9 r180 bottom
C74 "100nF" HEIG/SM/C_0805#2 88.4,53 r180 top
C75 "100nF" HEIG/SM/C_0805#1 36.5,22.1 r180 bottom
C76 "100nF" HEIG/SM/C_0805#1 68.3,1.9 r180 bottom
C77 "100nF" HEIG/SM/C_0805#1 89.466,1.9 r180 bottom
C78 "100nF" HEIG/SM/C_0805#2 75.1,52.1 r0 top
C79 "100nF" HEIG/SM/C_0805#1 78.1,19.8 r180 bottom
D1 "Led" HEIG/SM/D_0805 30.4,69.1 r0 top
D2 "SS24" HEIG/SM/DO214 38.4,64.1 r180 top
D3 "Led" HEIG/SM/D_0805 35.6,69.1 r0 top
D4 "SS24" HEIG/SM/DO214 46.899,64.1 r180 top
D5 "Led" HEIG/SM/D_0805 72.5,69.1 r0 top
D6 "Led" HEIG/SM/D_0805 56.5,69.1 r0 top
D7 "Led" HEIG/SM/D_0805 61.5,69.1 r0 top
D8 "Led" HEIG/SM/D_0805 46.2,69.1 r0 top
D9 "Led" HEIG/SM/D_0805 85.6,69.1 r0 top
D10 "Led Rouge" HEIG/SM/D_0805 94.7,13.2 r0 top
D11 "Led Rouge" HEIG/SM/D_0805 94.7,10 r0 top
D12 "Led Rouge" HEIG/SM/D_0805 94.7,19.5 r0 top
D13 "Led Rouge" HEIG/SM/D_0805 94.7,16.4 r0 top
F1 "2A" HEIG/LITTLEFUSE/NANO2 11.255,55.645 r0 top
F2 "2A" HEIG/LITTLEFUSE/NANO2 11.355,65.245 r0 top
H1 "M3" HEIG/HOLE/M3 96.2,3.8 r0 top
H2 "M3" HEIG/HOLE/M3 3.8,3.8 r0 top
H3 "M3" HEIG/HOLE/M3 3.8,76.2 r0 top
H4 "M3" HEIG/HOLE/M3 96.2,76.2 r0 top
IC1 "TPS62400" HEIG/TI/S-PVSON-N10 4.9,42.8 r0 top
IC3 "ITS4142N" HEIG/SM/SOT223 38.4,60 r180 top
IC4 "ITS4142N" HEIG/SM/SOT223 46.9,60 r180 top
IC5 "20MHz" HEIG/OSC/SPX0/SG-310 53.5,44.8 r0 top
IC7 "SN74LVC14APWR" HEIG/SM/SOIC14 30.3,19.6 r0 top
IC8 "SN74LVC14APWR" HEIG/SM/SOIC14 72.6,19.7 r0 top
L1 "1k/6A@100MHz" HEIG/SM/L_1210 19.303,55.703 r0 top
L2 "1k/6A@100MHz" HEIG/SM/L_1210 19.303,65.303 r0 top
L3 "3.3uH" HEIG/COILS/VLF4012A 8.4,47.9 r0 top
L5 "3.3uH" HEIG/COILS/VLF4012A 8.4,44.2 r0 top
Q1 "ZVN4106F" SM/SOT23_123 87.1,32.7 r270 top
Q2 "ZVN4106F" SM/SOT23_123 87.1,29 r270 top
Q3 "ZVN4106F" SM/SOT23_123 87.1,36.4 r270 top
Q4 "ZVN4106F" SM/SOT23_123 87.1,40.2 r270 top
R1 "15k" HEIG/SM/R_0603#1 3.7,37.7 r0 top
R2 "220k" HEIG/SM/R_0603#2 10.478,47.9 r180 bottom
R3 "49.1k" HEIG/SM/R_0603#2 10.5,49.9 r180 bottom
R5 "10k" HEIG/SM/R_0603#1 3.7,39.6 r0 top
R6 "147k" HEIG/SM/R_0603#2 10.578,44.3 r180 bottom
R7 "68k" HEIG/SM/R_0603#2 12.022,42.3 r0 bottom
R8 "0R" HEIG/SM/R_1206 21.3,77.302 r270 top
R10 "0R" HEIG/SM/R_0805#1 33.8,57.9 r270 bottom
R11 "750R" HEIG/SM/R_0805#1 30.3,69.1 r180 bottom
R12 "0R" HEIG/SM/R_0805#1 42.367,57.933 r270 bottom
R13 "750R" HEIG/SM/R_0805#1 35.5,69.1 r180 bottom
R14 "5K" HEIG/SM/R_0805#1 64.6,55.2 r0 bottom
R15 "680R" HEIG/SM/R_0805#1 85.5,72.6 r180 bottom
R16 "0R" HEIG/SM/R_0805#2 45.5,48.4 r0 top
R17 "22R" HEIG/SM/R_0805#2 58.1,46.7 r0 top
R18 "5K" HEIG/SM/R_0805#1 64.6,57.7 r0 bottom
R19 "22R" HEIG/SM/R_0805#2 58.067,44.367 r270 top
R20 "680R" HEIG/SM/R_0805#1 72.4,72.6 r180 bottom
R21 "10k" HEIG/SM/R_0805#2 43.334,50.7 r180 top
R22 "5K" HEIG/SM/R_0805#1 64.6,60.3 r0 bottom
R23 "680R" HEIG/SM/R_0805#1 58.534,71.9 r0 bottom
R24 "5K" HEIG/SM/R_0805#1 64.6,62.8 r0 bottom
R25 "680R" HEIG/SM/R_0805#1 63.534,71.9 r0 bottom
R26 "1k" HEIG/SM/R_0805#2 47.634,50.7 r180 top
R27 "5K" HEIG/SM/R_0805#1 53.234,60.3 r0 bottom
R28 "680R" HEIG/SM/R_0805#1 50.434,71.9 r0 bottom
R29 "750R" HEIG/SM/R_0805#1 72.4,69.1 r180 bottom
R30 "750R" HEIG/SM/R_0805#1 56.4,69.1 r180 bottom
R31 "750R" HEIG/SM/R_0805#1 61.4,69.1 r180 bottom
R32 "750R" HEIG/SM/R_0805#1 46.1,69.1 r180 bottom
R33 "750R" HEIG/SM/R_0805#1 85.5,69.1 r180 bottom
R34 "12k" HEIG/SM/R_0805#1 27.233,18.833 r270 bottom
R35 "1.2k" HEIG/SM/R_0805#1 27.266,10.9 r90 bottom
R36 "0.1R" HEIG/SM/R_1206 27.233,14.233 r270 top
R37 "1.2k" HEIG/SM/R_0805#1 27.266,14.266 r270 bottom
R38 "12k" HEIG/SM/R_0805#1 24.966,10.9 r90 bottom
R39 "1.2k" HEIG/SM/R_0805#1 48.366,10.9 r90 bottom
R40 "12k" HEIG/SM/R_0805#1 48.333,18.833 r270 bottom
R41 "1.2k" HEIG/SM/R_0805#1 48.366,14.266 r270 bottom
R42 "12k" HEIG/SM/R_0805#1 46.066,10.9 r90 bottom
R43 "0.1R" HEIG/SM/R_1206 48.333,14.233 r270 top
R44 "22R" HEIG/SM/R_0805#2 22.9,31.2 r90 top
R45 "22R" HEIG/SM/R_0805#2 20.8,31.2 r90 top
R46 "10k" HEIG/SM/R_0805#1 85.234,62.8 r0 bottom
R47 "10k" HEIG/SM/R_0805#1 85.267,60.267 r0 bottom
R48 "10k" HEIG/SM/R_0805#1 85.267,57.767 r0 bottom
R49 "10k" HEIG/SM/R_0805#1 85.2,55.2 r0 bottom
R50 "150R" HEIG/SM/R_0805#1 92.534,62.8 r0 bottom
R51 "22K" HEIG/SM/R_0805#2 33.2,29.2 r0 top
R52 "150R" HEIG/SM/R_0805#1 92.534,60.3 r0 bottom
R53 "150R" HEIG/SM/R_0805#1 92.534,57.8 r0 bottom
R54 "150R" HEIG/SM/R_0805#1 92.6,55.3 r0 bottom
R55 "150R" HEIG/SM/R_0805#1 94.566,13.2 r180 bottom
R56 "150R" HEIG/SM/R_0805#1 94.566,10 r180 bottom
R57 "1.2k" HEIG/SM/R_0805#1 69.566,10.9 r90 bottom
R58 "12k" HEIG/SM/R_0805#1 69.533,18.833 r270 bottom
R59 "1.2k" HEIG/SM/R_0805#1 69.566,14.266 r270 bottom
R60 "12k" HEIG/SM/R_0805#1 67.266,10.9 r90 bottom
R61 "0.1R" HEIG/SM/R_1206 69.533,14.233 r270 top
R62 "1.2k" HEIG/SM/R_0805#1 90.733,10.867 r90 bottom
R63 "12k" HEIG/SM/R_0805#1 90.7,18.8 r270 bottom
R64 "1.2k" HEIG/SM/R_0805#1 90.733,14.233 r270 bottom
R65 "12k" HEIG/SM/R_0805#1 88.433,10.867 r90 bottom
R66 "0.1R" HEIG/SM/R_1206 90.7,14.2 r270 top
R67 "150R" HEIG/SM/R_0805#1 92.6,34.7 r0 bottom
R68 "22R" HEIG/SM/R_0805#2 56.5,31.2 r90 top
R69 "10k" HEIG/SM/R_0805#1 75.167,60.267 r0 bottom
R70 "150R" HEIG/SM/R_0805#1 94.6,19.5 r180 bottom
R71 "150R" HEIG/SM/R_0805#1 92.6,37.2 r0 bottom
R72 "150R" HEIG/SM/R_0805#1 92.6,32.2 r0 bottom
R73 "10k" HEIG/SM/R_0805#1 75.167,55.167 r0 bottom
R74 "10k" HEIG/SM/R_0805#1 75.167,62.767 r0 bottom
R75 "22R" HEIG/SM/R_0805#2 58.6,31.2 r90 top
R76 "150R" HEIG/SM/R_0805#1 92.6,39.7 r0 bottom
R77 "22K" HEIG/SM/R_0805#2 68.7,29.1 r0 top
R78 "150R" HEIG/SM/R_0805#1 94.6,16.4 r180 bottom
R79 "10k" HEIG/SM/R_0805#1 75.167,57.767 r0 bottom
R80 "10k" HEIG/SM/R_0805#2 16.967,18.933 r180 top
R81 "10k" HEIG/SM/R_0805#2 16.967,21.133 r180 top
R82 "10k" HEIG/SM/R_0805#2 44.1,29.2 r180 top
R83 "10k" HEIG/SM/R_0805#2 48.7,30.6 r270 top
R84 "10k" HEIG/SM/R_0805#2 57.1,22.7 r180 top
R85 "10k" HEIG/SM/R_0805#2 59.2,24.9 r180 top
R86 "10k" HEIG/SM/R_0805#2 82.9,27.9 r0 top
R87 "10k" HEIG/SM/R_0805#2 82.9,25.7 r0 top
R100 "0R" HEIG/SM/R_0805#1 9.067,5.667 r90 bottom
R101 "0R" HEIG/SM/R_0805#1 9.467,73.633 r270 bottom
R102 "0R" HEIG/SM/R_0805#1 94.1,70.6 r180 bottom
R103 "0R" HEIG/SM/R_0805#1 95.8,23.6 r180 bottom
R150 "0R" HEIG/SM/R_0805#2 20.5,38.2 r0 top
T1 "BSP318S" HEIG/SM/SOT223 29.972,64.598 r180 top
U1 "C8051F330" HEIG/SM/QFN20 52.6,50.5 r90 top
U2 "74LVC14" HEIG/SM/SOIC14 56.1,56.5 r90 top
U3 "TLP281-4" HEIG/SM/SOIC16/7.0M 66.8,55.2 r90 top
U7 "TLP281-4" HEIG/SM/SOIC16/7.0M 77.1,55.2 r90 top
U8 "A3950" HEIG/SM/TSSOP16 20.233,10.933 r0 top
U9 "LMV821DCKT" HEIG/SM/SC70 24.433,5.633 r180 bottom
U10 "AM26LS32ACD" HEIG/SM/SOIC16 9.133,11.183 r0 top
U11 "LMV821DCKT" HEIG/SM/SC70 45.533,5.633 r180 bottom
U12 "A3950" HEIG/SM/TSSOP16 41.333,10.933 r0 top
U13 "AM26LS32ACD" HEIG/SM/SOIC16 30.233,11.183 r0 top
U14 "TMS320F2806PZA" QUAD.50M/100/WG16.00 27.573,45.336 r270 top
U16 "LMV821DCKT" HEIG/SM/SC70 66.733,5.633 r180 bottom
U17 "A3950" HEIG/SM/TSSOP16 62.533,10.933 r0 top
U18 "AM26LS32ACD" HEIG/SM/SOIC16 51.433,11.183 r0 top
U19 "LMV821DCKT" HEIG/SM/SC70 87.9,5.6 r180 bottom
U20 "A3950" HEIG/SM/TSSOP16 83.7,10.9 r0 top
U21 "AM26LS32ACD" HEIG/SM/SOIC16 72.6,11.15 r0 top
U22 "TMS320F2806PZA" QUAD.50M/100/WG16.00 63.1,45.3 r270 top
U24 "TLP281-4" HEIG/SM/SOIC16/7.0M 87.2,55.2 r90 top
U25 "TLP281" HEIG/SM/SOIC04/7.0M 60.3,66.9 r270 top
X1 "PWR" "HEIG/PHOENIX/MC 1,5/ 2-G-3,81" 8,59.5 r270 top
X2 "+12V" "HEIG/PHOENIX/MC 1,5/ 2-G-3,81" 8,69.1 r270 top
X3 "Sorties" HEIG/WAGO/733-336 25.3,75 r0 top
X4 "Capteur Gauche" HEIG/WAGO/733-334 82.6,75 r0 top
X5 "C2" HEIG/CON/INLINE03 2.7,32.7 r270 top
X6 "Capteur Droite" HEIG/WAGO/733-334 69.5,75 r0 top
X7 "JTAG" HEIG/CON/INLINE14/2 5.3,8.8 r90 top
X8 "Vaccuostat Gauche/Droite" HEIG/WAGO/733-334 56.4,75 r0 top
X9 "Capteur Gauche" HEIG/WAGO/733-334 43.3,75 r0 top
X10 "I2C" HEIG/CON/MICROMATCH/4F 13.4,74.5 r0 top
X11 "MOTEUR A" HEIG/CONN/HE10/10 23.693,6.023 r270 top
X12 "MOTEUR A" HEIG/CONN/HE10/10 44.793,6.023 r270 top
X13 "Fin de courses" HEIG/WAGO/733-338 94.9,67.8 r270 top
X14 "MOTEUR A" HEIG/CONN/HE10/10 65.993,6.023 r270 top
X15 "MOTEUR A" HEIG/CONN/HE10/10 87.16,5.99 r270 top
X16 "Fin de courses" HEIG/WAGO/733-338 94.9,44.7 r270 top
~FV1 "VIA1" VIA1 89.6,19.55 r0 top
~FV2 "VIA1" VIA1 89.6,18.65 r0 top
~FV3 "VIA1" VIA1 88.75,19.55 r0 top
~FV4 "VIA1" VIA1 89.6,20.4 r0 top
~FV5 "VIA1" VIA1 87.1,14.5 r0 top
~FV6 "VIA1" VIA1 87.1,13.55 r0 top
~FV7 "VIA1" VIA1 86.2,14.5 r0 top
~FV8 "VIA1" VIA1 86.2,13.55 r0 top
~FV9 "VIA1" VIA1 85.25,14.5 r0 top
~FV10 "VIA1" VIA1 85.25,13.55 r0 top
~FV11 "VIA1" VIA1 84.35,14.5 r0 top
~FV12 "VIA1" VIA1 84.35,13.55 r0 top
~FV13 "VIA1" VIA1 87.15,19.9 r0 top
~FV14 "VIA1" VIA1 87.15,20.75 r0 top
~FV15 "VIA1" VIA1 86,21.3 r0 top
~FV16 "VIA1" VIA1 86,20.35 r0 top
~FV17 "VIA1" VIA1 33.2,53.8 r0 top
~FV18 "VIA1" VIA1 32.4,53.8 r0 top
~FV19 "VIA1" VIA1 31.6,53.8 r0 top
~FV20 "VIA1" VIA1 30.75,53.8 r0 top
~FV21 "VIA1" VIA1 33.2,54.6 r0 top
~FV22 "VIA1" VIA1 32.4,54.6 r0 top
~FV23 "VIA1" VIA1 31.6,54.6 r0 top
~FV24 "VIA1" VIA1 30.75,54.6 r0 top
~FV25 "VIA1" VIA1 48,42.25 r0 top
~FV26 "VIA1" VIA1 21.6,67.2 r0 top
~FV27 "VIA1" VIA1 22.7,67.2 r0 top
~FV28 "VIA1" VIA1 22.7,68.1 r0 top
~FV29 "VIA1" VIA1 21.6,68.1 r0 top
~FV30 "VIA1" VIA1 21.6,69.1 r0 top
~FV31 "VIA1" VIA1 22.7,69.1 r0 top
~FV32 "VIA1" VIA1 22.7,70 r0 top
~FV33 "VIA1" VIA1 21.6,70 r0 top
~FV34 "VIA1" VIA1 45.5,41.65 r0 top
~FV35 "VIA1" VIA1 22.7,57.65 r0 top
~FV36 "VIA1" VIA1 21.6,57.65 r0 top
~FV37 "VIA1" VIA1 21.6,58.6 r0 top
~FV38 "VIA1" VIA1 22.7,58.6 r0 top
~FV39 "VIA1" VIA1 22.7,59.6 r0 top
~FV40 "VIA1" VIA1 21.6,59.6 r0 top
~FV41 "VIA1" VIA1 22.7,60.65 r0 top
~FV42 "VIA1" VIA1 21.6,60.65 r0 top
~FV43 "VIA1" VIA1 22.7,61.75 r0 top
~FV44 "VIA1" VIA1 21.6,61.75 r0 top
~FV45 "VIA1" VIA1 66.1,14.5 r0 top
~FV46 "VIA1" VIA1 44.9,14.45 r0 top
~FV47 "VIA1" VIA1 23.75,14.45 r0 top
~FV48 "VIA1" VIA1 66.1,13.55 r0 top
~FV49 "VIA1" VIA1 44.9,13.55 r0 top
~FV50 "VIA1" VIA1 23.8,13.6 r0 top
~FV51 "VIA1" VIA1 65.2,14.5 r0 top
~FV52 "VIA1" VIA1 65.2,13.55 r0 top
~FV53 "VIA1" VIA1 64.2,14.5 r0 top
~FV54 "VIA1" VIA1 64.2,13.55 r0 top
~FV55 "VIA1" VIA1 63.25,14.5 r0 top
~FV56 "VIA1" VIA1 63.25,13.55 r0 top
~FV57 "VIA1" VIA1 43.85,14.45 r0 top
~FV58 "VIA1" VIA1 43.85,13.55 r0 top
~FV59 "VIA1" VIA1 42.75,13.55 r0 top
~FV60 "VIA1" VIA1 42.75,14.45 r0 top
~FV61 "VIA1" VIA1 41.8,14.45 r0 top
~FV62 "VIA1" VIA1 41.8,13.55 r0 top
~FV63 "VIA1" VIA1 22.7,14.45 r0 top
~FV64 "VIA1" VIA1 22.7,13.6 r0 top
~FV65 "VIA1" VIA1 21.5,14.45 r0 top
~FV66 "VIA1" VIA1 21.5,13.65 r0 top
~FV67 "VIA1" VIA1 20.5,14.45 r0 top
~FV68 "VIA1" VIA1 20.5,13.65 r0 top
~FV69 "VIA1" VIA1 13.4,48.85 r0 top
~FV70 "VIA1" VIA1 14.15,48.85 r0 top
~FV71 "VIA1" VIA1 14.9,48.85 r0 top
~FV72 "VIA1" VIA1 14.9,48.05 r0 top
~FV73 "VIA1" VIA1 14.15,48.05 r0 top
~FV74 "VIA1" VIA1 13.4,48.05 r0 top
~FV75 "VIA1" VIA1 13.4,47.25 r0 top
~FV76 "VIA1" VIA1 14.15,47.25 r0 top
~FV77 "VIA1" VIA1 14.9,47.25 r0 top
~FV78 "VIA1" VIA1 14.9,44.85 r0 top
~FV79 "VIA1" VIA1 14.9,44 r0 top
~FV80 "VIA1" VIA1 14.9,43.15 r0 top
~FV81 "VIA1" VIA1 14.1,44.85 r0 top
~FV82 "VIA1" VIA1 14.1,44 r0 top
~FV83 "VIA1" VIA1 14.1,43.15 r0 top
~FV84 "VIA1" VIA1 13.35,44.85 r0 top
~FV85 "VIA1" VIA1 13.35,44 r0 top
~FV86 "VIA1" VIA1 13.35,43.15 r0 top
~FV87 "VIA1" VIA1 14.9,50.2 r0 top
~FV88 "VIA1" VIA1 14.15,50.2 r0 top
~FV89 "VIA1" VIA1 6.9,35.8 r0 top
~FV90 "VIA1" VIA1 7.75,35.8 r0 top
~FV91 "VIA1" VIA1 8.55,35.8 r0 top
~FV92 "VIA1" VIA1 8.55,36.65 r0 top
~FV93 "VIA1" VIA1 7.75,36.65 r0 top
~FV94 "VIA1" VIA1 6.9,36.65 r0 top
~FV95 "VIA1" VIA1 6.9,37.5 r0 top
~FV96 "VIA1" VIA1 7.75,37.5 r0 top
~FV97 "VIA1" VIA1 8.55,37.5 r0 top
~FV98 "VIA1" VIA1 44.8,20.75 r0 top
~FV99 "VIA1" VIA1 44.05,20.75 r0 top
~FV100 "VIA1" VIA1 43.3,20.75 r0 top
~FV101 "VIA1" VIA1 23.75,20.75 r0 top
~FV102 "VIA1" VIA1 23,20.75 r0 top
~FV103 "VIA1" VIA1 22.25,20.75 r0 top
~FV104 "VIA1" VIA1 67.45,18.9 r0 top
~FV105 "VIA1" VIA1 68.2,18.9 r0 top
~FV106 "VIA1" VIA1 68.2,19.7 r0 top
~FV107 "VIA1" VIA1 67.45,19.7 r0 top
~FV108 "VIA1" VIA1 67.45,20.55 r0 top
~FV109 "VIA1" VIA1 68.2,20.55 r0 top
~FV110 "VIA1" VIA1 46.9,18.85 r0 top
~FV111 "VIA1" VIA1 46.15,18.85 r0 top
~FV112 "VIA1" VIA1 46.15,19.75 r0 top
~FV113 "VIA1" VIA1 46.9,19.75 r0 top
~FV114 "VIA1" VIA1 46.9,20.7 r0 top
~FV115 "VIA1" VIA1 46.15,20.7 r0 top
~FV116 "VIA1" VIA1 25.1,18.9 r0 top
~FV117 "VIA1" VIA1 25.85,18.9 r0 top
~FV118 "VIA1" VIA1 25.85,19.8 r0 top
~FV119 "VIA1" VIA1 25.1,19.8 r0 top
~FV120 "VIA1" VIA1 25.1,20.65 r0 top
~FV121 "VIA1" VIA1 25.85,20.65 r0 top
~FV122 "VIA1" VIA1 12.75,9.2 r0 top
~FV123 "VIA1" VIA1 13.6,9.2 r0 top
~FV124 "VIA1" VIA1 14.5,9.2 r0 top
~FV125 "VIA1" VIA1 16.55,13.1 r0 top
~FV126 "VIA1" VIA1 15.7,13.1 r0 top
~FV127 "VIA1" VIA1 15.7,14 r0 top
~FV128 "VIA1" VIA1 16.55,14 r0 top
~FV129 "VIA1" VIA1 88.75,20.4 r0 top
~FV130 "VIA1" VIA1 88.75,18.65 r0 top
~FV131 "VIA1" VIA1 90.6,25 r0 top
~FV132 "VIA1" VIA1 90.6,25.85 r0 top
~FV133 "VIA1" VIA1 90.6,26.65 r0 top
~FV134 "VIA1" VIA1 91.55,1.9 r0 top
~FV135 "VIA1" VIA1 49.25,1.9 r0 top
~FV136 "VIA1" VIA1 28.05,1.9 r0 top
~FV137 "VIA1" VIA1 80.234,21.566 r0 top